# Altium PCB DisplayBoard.PcbDoc
Units mil, origin at the board's own origin, x right, y up, seen from the top; angles counter-clockwise.
Board outline 3937.01 x 3031.5 mil, 2 copper layers (Top Layer, Bottom Layer); 36 components, 89 nets, 137 pads, 0 vias.
Unrouted connection lines stored in the file: 67.
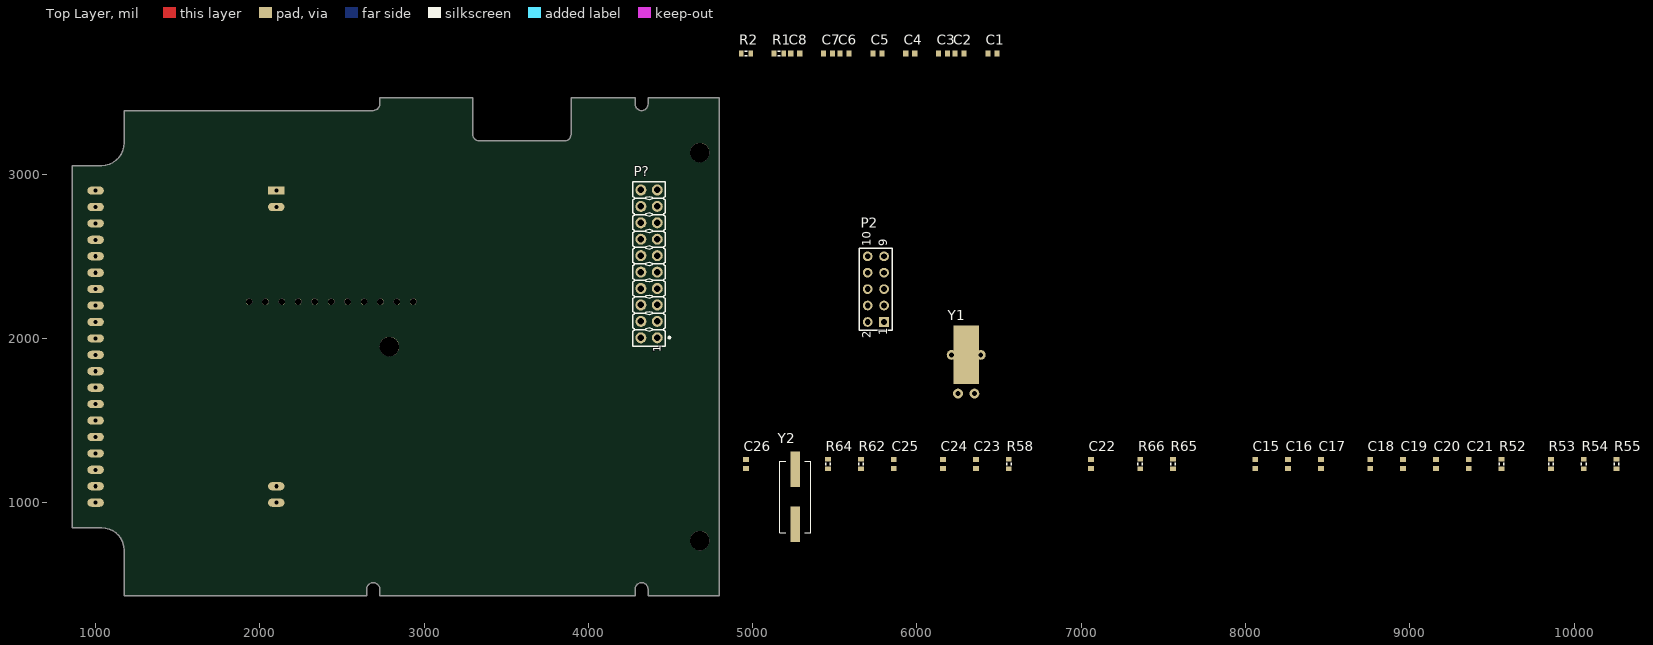
[diagram p0: Top Layer view]
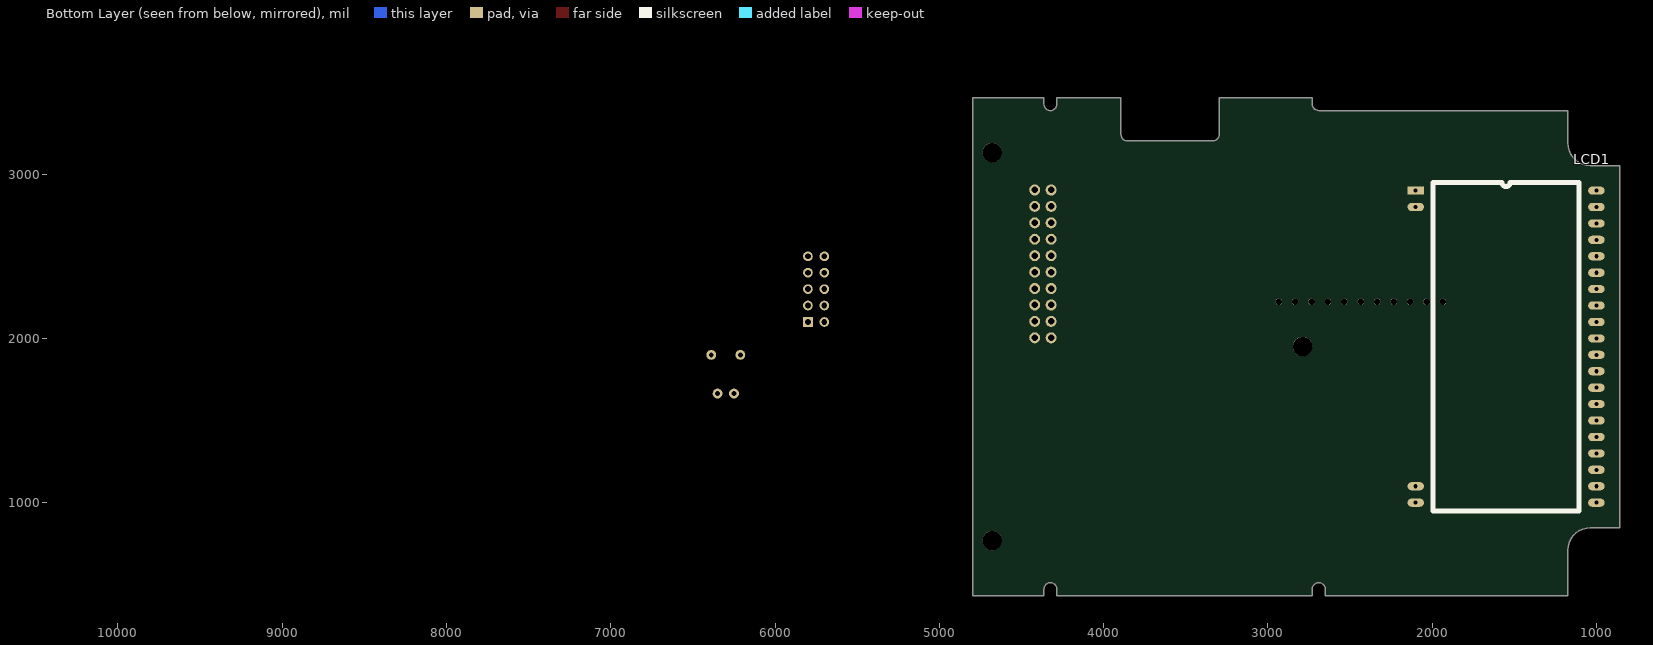
[diagram p1: Bottom Layer view, seen from below]

## Layer stack, top to bottom
Top Solder: solder mask 0.4, Solder Resist, Dk 3.5
Top Layer: signal copper 1.4
Dielectric 1: dielectric 12.6, FR-4, Dk 4.8
Bottom Layer: signal copper 1.4
Bottom Solder: solder mask 0.4, Solder Resist, Dk 3.5

## Board outline
4363.19,434.25 4796.26,434.25 4796.26,3465.75 4363.19,3465.75 4363.19,3426.38 4362.33,3418.19 4359.79,3410.36 4355.67,3403.24 4350.16,3397.12 4343.5,3392.28 4335.98,3388.93 4327.93,3387.22 4319.7,3387.22 4311.65,3388.93 4304.13,3392.28 4297.48,3397.12 4291.97,3403.24 4287.85,3410.36 4285.31,3418.19 4284.45,3426.38 4284.45,3465.75 3894.68,3465.75 3894.68,3241.34 3893.7,3232.58 3890.79,3224.26 3886.1,3216.79 3879.86,3210.56 3872.4,3205.87 3864.08,3202.96 3855.32,3201.97 3335.63,3201.97 3326.87,3202.96 3318.55,3205.87 3311.08,3210.56 3304.85,3216.79 3300.16,3224.26 3297.25,3232.58 3296.26,3241.34 3296.26,3465.75 2729.33,3465.75 2729.33,3426.38 2728.34,3417.62 2725.43,3409.3 2720.74,3401.83 2714.51,3395.6 2707.04,3390.91 2698.72,3387.99 2689.96,3387.01 1174.21,3387.01 1174.21,3190.16 1172.12,3166.23 1165.9,3143.03 1155.75,3121.26 1141.97,3101.58 1124.99,3084.6 1105.31,3070.82 1083.55,3060.67 1060.35,3054.46 1036.42,3052.36 859.25,3052.36 859.25,847.64 1036.42,847.64 1060.35,845.54 1083.55,839.33 1105.31,829.18 1124.99,815.4 1141.97,798.42 1155.75,778.74 1165.9,756.97 1172.12,733.77 1174.21,709.84 1174.21,434.25 2650.59,434.25 2650.59,473.62 2651.45,481.81 2653.99,489.64 2658.11,496.76 2663.62,502.88 2670.28,507.72 2677.79,511.07 2685.85,512.78 2694.08,512.78 2702.13,511.07 2709.65,507.72 2716.3,502.88 2721.81,496.76 2725.93,489.64 2728.47,481.81 2729.33,473.62 2729.33,434.25 4284.45,434.25 4284.45,473.62 4285.31,481.81 4287.85,489.64 4291.97,496.76 4297.48,502.88 4304.13,507.72 4311.65,511.07 4319.7,512.78 4327.93,512.78 4335.98,511.07 4343.5,507.72 4350.16,502.88 4355.67,496.76 4359.79,489.64 4362.33,481.81 4363.19,473.62

## Design rules (kind name [scope] priority, off if disabled: settings)
Clearance [All] p1: gap=10 ignorepadtopadclearanceinfootprint=FALSE except(0: Arc-Hole Track-Hole SMDPad-Hole THPad-Hole Via-Hole Fill-Hole Poly-Hole Region-Hole Text-Hole)
DiffPairsRouting [All] p1: maxlimit=10 minlimit=10 mostfreqgap=10 toplayer_minwidth=15 toplayer_maxwidth=15 toplayer_prefwidth=15 bottomlayer_minwidth=15 bottomlayer_maxwidth=15 bottomlayer_prefwidth=15 maxuncoupledlength=500
PolygonConnect [All] p1: connectstyle=Relief reliefconductorwidth=10 reliefentries=4 polygonreliefangle="90 Angle" airgapwidth=10
RoutingVias [All] p1: holewidth=28 width=50 viastyle="Through Hole" minholewidth=28 minwidth=50 maxholewidth=28 maxwidth=50
SolderMaskExpansion [All] p1: expansion=4
Width [All] p1: maxlimit=10 minlimit=10 preferedwidth=10
29 further rules are at their usual default settings.

## Classes and differential pairs
net class CPU_KBD_R[7..0]: CPU_KBD_R0 CPU_KBD_R1 CPU_KBD_R2 CPU_KBD_R3 CPU_KBD_R4 CPU_KBD_R5 CPU_KBD_R6 CPU_KBD_R7
net class CPU_KBD_C[2..0]: CPU_KBD_C0 CPU_KBD_C1 CPU_KBD_C2
component class "U_[03] Connector": P?
component class "U_[02] LCD": C1 C2 C3 C4 C5 C6 C7 C8 LCD1 R1 R2
component class "U_[01] CPU": C15 C16 C17 C18 C19 C20 C21 C22 C23 C24 C25 C26 P2 R52 R53 R54 R55 R58 R62 R64 R65 R66 U2 Y1 Y2
differential pair CPU_USB: +CPU_USB_P -CPU_USB_N

## Components (designator, comment, footprint, x,y, rotation, side; value= is the part's Value field where it differs from the comment)
C1 "Cap Semi" 1608[0603] 6459.25,3735 r0 top value=1uF
C2 "Cap Semi" 1608[0603] 6259.25,3735 r0 top value=1uF
C3 "Cap Semi" 1608[0603] 6159.25,3735 r0 top value=1uF
C4 "Cap Semi" 1608[0603] 5959.25,3735 r0 top value=1uF
C5 "Cap Semi" 1608[0603] 5759.25,3735 r0 top value=1uF
C6 "Cap Semi" 1608[0603] 5559.25,3735 r0 top value=1uF
C7 "Cap Semi" 1608[0603] 5459.25,3735 r0 top value=1uF
C8 "Cap Semi" 1608[0603] 5259.25,3735 r0 top value=1uF
C15 "Cap Semi" 1608[0603] 8059.25,1235 r90 top value=100nF
C16 "Cap Semi" 1608[0603] 8259.25,1235 r90 top value=100nF
C17 "Cap Semi" 1608[0603] 8459.25,1235 r90 top value=100nF
C18 "Cap Semi" 1608[0603] 8759.25,1235 r90 top value=100nF
C19 "Cap Semi" 1608[0603] 8959.25,1235 r90 top value=100nF
C20 "Cap Semi" 1608[0603] 9159.25,1235 r90 top value=100nF
C21 "Cap Semi" 1608[0603] 9359.25,1235 r90 top value=10uF
C22 "Cap Semi" 1608[0603] 7059.25,1235 r90 top value=10pF
C23 "Cap Semi" 1608[0603] 6359.25,1235 r90 top value=10pF
C24 "Cap Semi" 1608[0603] 6159.25,1235 r90 top value=100nF
C25 "Cap Semi" 1608[0603] 5859.25,1235 r90 top value=27pF
C26 "Cap Semi" 1608[0603] 4959.25,1235 r90 top value=27pF
LCD1 "EA DOGM132" "EA DOGM132-5" 2100,2900 r180 bottom
P2 "Header 5X2" HDR2X5 5800,2100 r90 top
P? "Header 10X2" SAMTEC_TSW-110-07-L-D-LL 4369.25,2453.66 r90 top
R1 "Res3" J1-0603 5159.25,3735 r0 top value=22R
R2 "Res3" J1-0603 4959.25,3735 r0 top value=22R
R52 "Res3" J1-0603 9559.25,1235 r90 top value=4k7
R53 "Res3" J1-0603 9859.25,1235 r90 top value=4k7
R54 "Res3" J1-0603 10059.25,1235 r90 top value=4k7
R55 "Res3" J1-0603 10259.25,1235 r90 top value=4k7
R58 "Res3" J1-0603 6559.25,1235 r90 top value=10k
R62 "Res3" J1-0603 5659.25,1235 r90 top value=10k
R64 "Res3" J1-0603 5459.25,1235 r90 top value=1M
R65 "Res3" J1-0603 7559.25,1235 r90 top value=22
R66 "Res3" J1-0603 7359.25,1235 r90 top value=22
Y1 "32768Hz" Crystal32k 6300,1663.78 r0 top
Y2 "8MHz" HC-49/US 5259.25,1035 r90 top

## Footprints (in the part's own frame and the unit in brackets; to place one, negate y for a bottom-side part, rotate by r counter-clockwise, add the part's x,y. Pads: shape width x height; smd on the part's side, far side on the other; paste and mask are expansions set on the pad)
1608[0603] [mm] "Chip Capacitor, Body 1.6x0.8mm, IPC High Density"
  rect 0.8x0.9 smd: 1(-0.7,0) 2(0.7,0)
  body extent -0.87,-0.48 0.87,0.48, height 1.3
Crystal32k [mil] "32.768kHz crystal footprint"
  round 60 hole 30: 0(-88.58,236.22) 0(88.58,236.22) 1(-50,0) 2(50,0)
  rect 157.48x354.33 smd: 0(0,236.22)
  body extent -58,58 60,373, height 118
"EA DOGM132-5" [mil]
  rect 100x50 hole 25: 1(0,0)
  oval 100x50 hole 25: 2(0,-100) 19(0,-1800) 20(0,-1900) 21(1100,-1900) 22(1100,-1800) 23(1100,-1700) 24(1100,-1600) 25(1100,-1500) 26(1100,-1400) 27(1100,-1300) 28(1100,-1200) 29(1100,-1100) 30(1100,-1000) 31(1100,-900) 32(1100,-800) 33(1100,-700) 34(1100,-600) 35(1100,-500) 36(1100,-400) 37(1100,-300) 38(1100,-200) 39(1100,-100) 40(1100,0)
  silkscreen extent 105,-1950 995,50, body extent -130,-2066 1169,131, height 315
HC-49/US [mm]
  rect 5.5x1.5 smd: 1(-4.25,0) 2(4.25,0)
  silkscreen extent -5.55,-2.41 5.55,2.41, body extent -6.85,-2.41 6.85,2.41, height 4.4
HDR2X5 [mm] "Connector; Header; 5x2 Position"
  rect 1.5x1.5 hole 0.9: 1(0,0)
  round 1.5 hole 0.9: 2(0,2.54) 3(2.54,0) 4(2.54,2.54) 5(5.08,0) 6(5.08,2.54) 7(7.62,0) 8(7.62,2.54) 9(10.16,0) 10(10.16,2.54)
  silkscreen extent -1.27,-1.27 11.43,3.81
J1-0603 [mm] "Chip Resistor, Body 1.6x0.8mm, IPC High Density"
  rect 0.7x0.9 smd: 1(-0.75,0) 2(0.75,0)
  silkscreen extent -0.2,-0.35 0.2,0.35, body extent -0.85,-0.48 0.85,0.48, height 0.9
SAMTEC_TSW-110-07-L-D-LL [mm] "20 Contacts, Pitch 2.54mm - Dual Row, Through Mount Straigh Header"
  round 1.7 hole 1: 1(-11.43,-1.27) 2(-11.43,1.27) 3(-8.89,-1.27) 4(-8.89,1.27) 5(-6.35,-1.27) 6(-6.35,1.27) 7(-3.81,-1.27) 8(-3.81,1.27) 9(-1.27,-1.27) 10(-1.27,1.27) 11(1.27,-1.27) 12(1.27,1.27) 13(3.81,-1.27) 14(3.81,1.27) 15(6.35,-1.27) 16(6.35,1.27) 17(8.89,-1.27) 18(8.89,1.27) 19(11.43,-1.27) 20(11.43,1.27)
  silkscreen extent -12.7,-3.29 12.7,2.54, body extent -12.7,-2.54 12.7,2.54, height 8.38

## Part data
C1 C2 C3 C4 C5 C6 C7 C8 C15 C16 C17 C18 C19 C20 C21 C22 C23 C24 C25 C26: "Capacitor (Semiconductor SIM Model)", LatestRevisionDate=29-May-2009, LatestRevisionNote="IPC-7351 Footprint Added.", PackageDescription="Chip Capacitor", PackageReference=C1206, Published=8-Jun-2000, Publisher="Altium Limited"
LCD1: "132x32 graphical LCD"
P2: "Header, 5-Pin, Dual row", LatestRevisionDate=17-Jul-2002, LatestRevisionNote="Re-released for DXP Platform.", Publisher="Altium Limited"
P?: "Header, 10-Pin, Dual row", LatestRevisionDate=17-Jul-2002, LatestRevisionNote="Re-released for DXP Platform.", Publisher="Altium Limited"
R1 R2 R52 R53 R54 R55 R58 R62 R64 R65 R66: "Resistor", LatestRevisionDate=29-May-2009, LatestRevisionNote="IPC-7351 Footprint Added.", PackageDescription="Chip Resistor", PackageReference=J1-0603, Published=8-Jun-2000, Publisher="Altium Limited"
Y1: library part XTAL, "Crystal Oscillator", LatestRevisionDate=17-Jul-2002, LatestRevisionNote="Re-released for DXP Platform.", PackageDescription="Crystal, Thru-Hole; 2 Leads; Body 3.1 x 8.2 mm (Dia.xH)", PackageReference=R38, Published=8-Jun-2000, Publisher="Altium Limited"
Y2: library part XTAL_1, "Crystal Oscillator", LatestRevisionDate=17-Jul-2002, LatestRevisionNote="Re-released for DXP Platform.", PackageDescription="Crystal, Thru-Hole; 2 Leads; Body 3.1 x 8.2 mm (Dia.xH)", PackageReference=R38, Published=8-Jun-2000, Publisher="Altium Limited"

## Free pads (board coordinates)
  round 39.37 hole 39.37: 1(1934.06,2223.07) 1(2034.06,2223.07) 1(2134.06,2223.07) 1(2234.06,2223.07) 1(2334.06,2223.07) 1(2434.06,2223.07) 1(2534.06,2223.07) 1(2634.06,2223.07) 1(2734.06,2223.07) 1(2834.06,2223.07) 1(2934.06,2223.07)
  round 118.11 hole 118.11: 1(2788.39,1950) 1(4678.15,768.9) 1(4678.15,3131.1)

## Nets (pads, with @x,y where several pads share a name; then routed paths per layer and width w, separated by ;. In a path a pad name is that pad's centre, name@x,y a point inside that pad or via, vN(x,y) a via of type N, cw(c..) or ccw(c..) an arc to the next point about the centre after c; other vN are vias at no path point)
3V3: C16.1 C17.1 C18.1 C19.1 C20.1 C21.1 LCD1.1 LCD1.20 P2.1 P2.2 P?.2 P?.4 P?.6 R52.2 R53.2 R54.2 R55.2 R58.2
BOOT0: P2.8 R62.2
CPU_KBD_C0: 
CPU_KBD_C1: 
CPU_KBD_C2: 
CPU_KBD_R0: 
CPU_KBD_R1: 
CPU_KBD_R2: 
CPU_KBD_R3: 
CPU_KBD_R4: 
CPU_KBD_R5: 
CPU_KBD_R6: 
CPU_KBD_R7: 
CPU_LCD_A0: 
CPU_LCD_CS: 
CPU_LCD_RST: 
CPU_PA1: 
CPU_PA4: 
CPU_PA15: 
CPU_PB12: 
CPU_PC4: 
CPU_PC5: 
CPU_PC13: 
CPU_PD2: 
CPU_USB_N: R66.2
CPU_USB_P: R65.2
CPU_USB_PU: 
GND: C1.1 C2.1 C4.1 C5.1 C7.1 C8.1 C15.2 C16.2 C17.2 C18.2 C19.2 C20.2 C21.2 C22.1 C23.1 C24.2 C25.1 C26.1 LCD1.26 LCD1.33 P2.9 P2.10 P?.1 P?.7 P?.17 P?.19 R62.1 Y1.0
HSO_IN: C25.2 R64.2 Y2.2
HSO_OUT: C26.2 R64.1 Y2.1
I2C1_SCL: R52.1
I2C1_SDA: R53.1
I2C2_SCL: R54.1
I2C2_SDA: R55.1
LCD_A0: LCD1.38
LCD_CS: LCD1.40
LCD_RST: LCD1.39
LSO_IN: C23.2 Y1.2
LSO_OUT: C22.2 Y1.1
MOSI: LCD1.36
NetC1_2: C1.2 LCD1.31 LCD1.32
NetC2_2: C2.2 LCD1.25
NetC3_1: C3.1 LCD1.30
NetC3_2: C3.2 LCD1.29
NetC4_2: C4.2 LCD1.24
NetC5_2: C5.2 LCD1.23
NetC6_1: C6.1 LCD1.28
NetC6_2: C6.2 LCD1.27
NetC7_2: C7.2 LCD1.22
NetC8_2: C8.2 LCD1.21
NetLCD1_2: LCD1.2 R1.2
NetLCD1_19: LCD1.19 R2.2
NetP?_3: P?.3
NetP?_5: P?.5
NetP?_9: P?.9
NetR65_1: R65.1
NetR66_1: R66.1
NetU2_42: 
NRST: C24.1 P2.7 R58.1
PWR_IRQ: P?.15
PWR_SCL: P?.11
PWR_SDA: P?.13
SCLK: LCD1.37
SPI1_MISO: 
SPI1_MOSI: 
SPI1_SCK: 
SPI2_MISO: 
SPI2_MOSI: 
SPI2_SCK: 
SPI3_MISO: 
SPI3_MOSI: 
SPI3_SCK: 
SWA_C: P?.12
SWA_NC: P?.10
SWA_NO: P?.14
SWB_C: P?.18
SWB_NC: P?.16
SWB_NO: P?.20
SYS_SWCLK: P2.4
SYS_SWDIO: P2.3
SYS_WKUP: 
TIM1_CH1: 
UART1_RX: P2.5
UART1_TX: P2.6
UART2_RX: 
UART2_TX: 
VBAT: C15.1
VCC: LCD1.34 LCD1.35
VRTC: P?.8
pads on no net: R1.1 R2.1

## Text inside footprints (layer, text, board x,y; h text height)
P2: Top Overlay "10" at 5720,2560 h50 r90; Top Overlay "9" at 5820,2560 h50 r90; Top Overlay "1" at 5820,2020 h50 r90; Top Overlay "2" at 5720,2000 h50 r90
P?: Top Overlay "1" at 4438.86,1915.2 h47.24 r90; Mechanical 14 "1" at 4438.86,1915.2 h47.24 r90